# Altium PCB Palletto_V2.PcbDoc (part 2 of 2)
Units mil, origin at the board's own origin, x right, y up, seen from the top; angles counter-clockwise.
Board outline 7345 x 9595 mil, 2 copper layers (Top Layer, Bottom Layer); 77 components, 98 nets, 384 pads, 99 vias.
Unrouted connection lines stored in the file: 1.
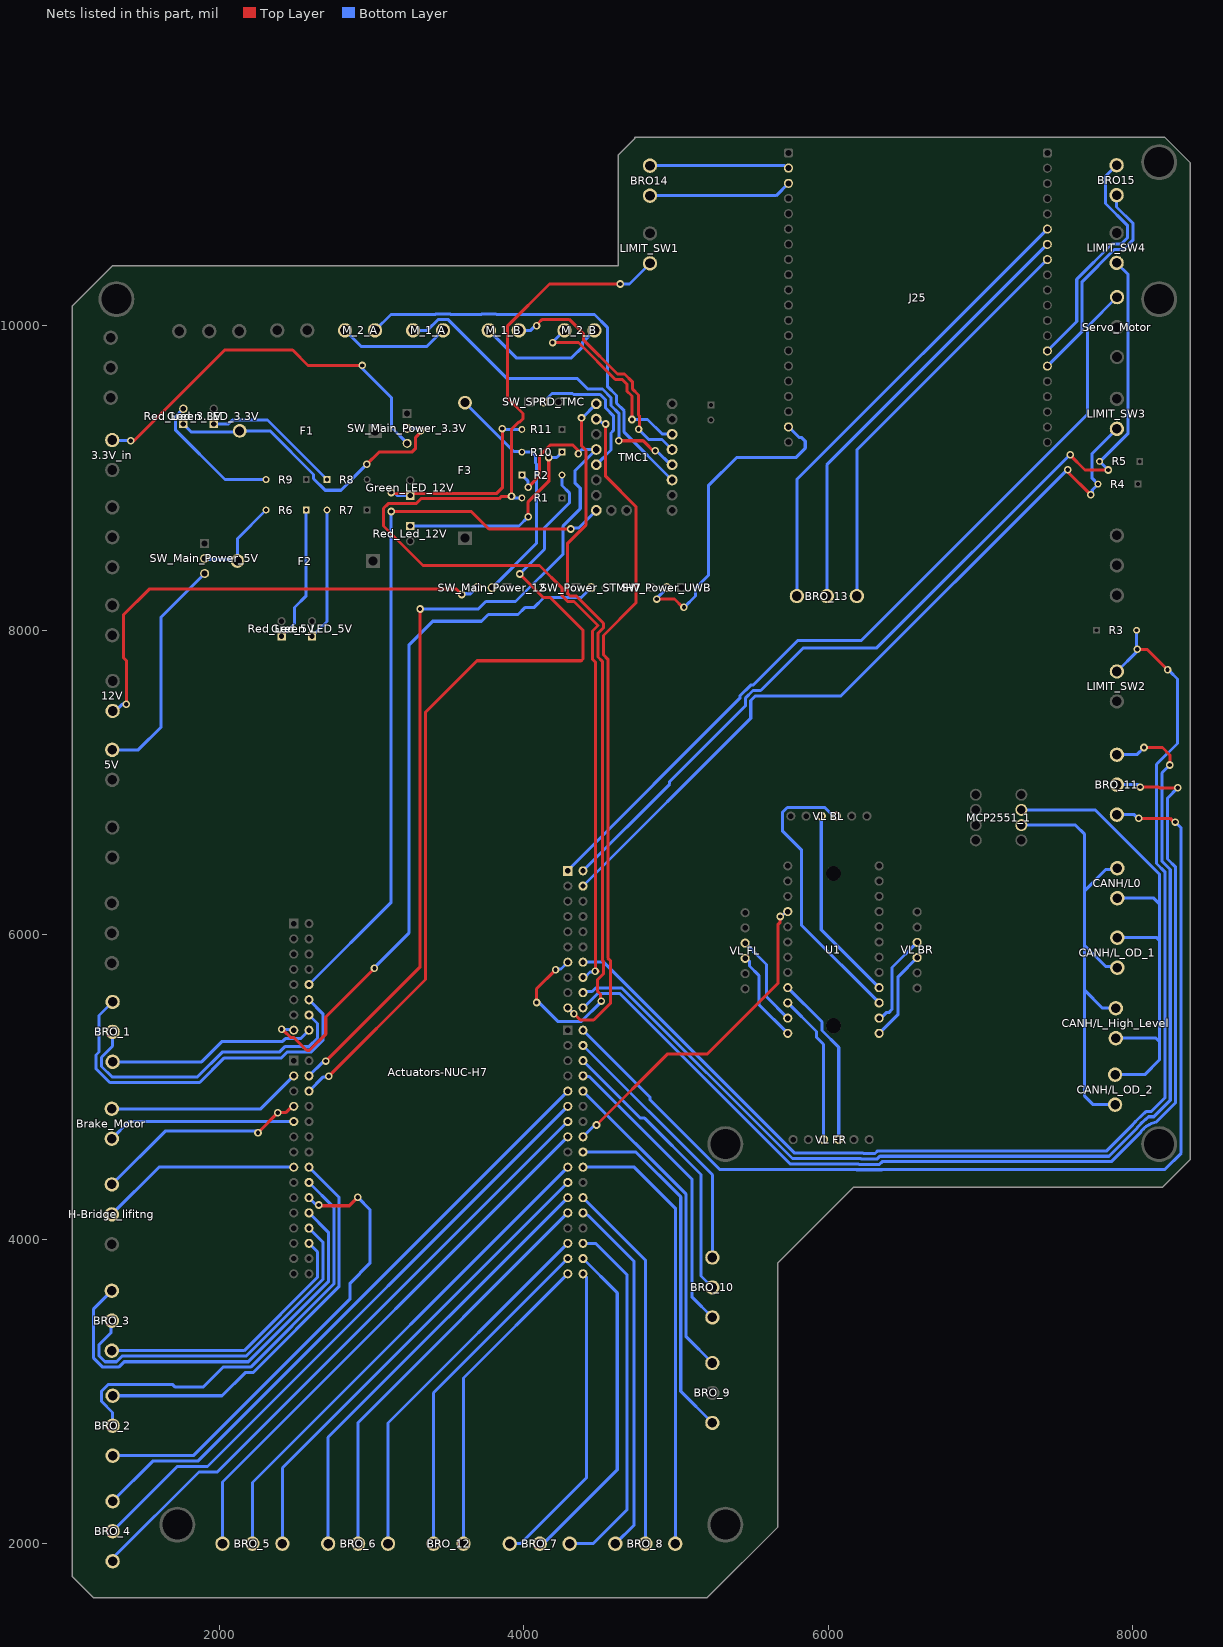
[diagram p2: the nets of this part, all layers, seen from the top]

## Via types
v1: diameter 50, hole 28, Top Layer to Bottom Layer, 99 vias

## Nets (pads, with @x,y where several pads share a name; then routed paths per layer and width w, separated by ;. In a path a pad name is that pad's centre, name@x,y a point inside that pad or via, vN(x,y) a via of type N, cw(c..) or ccw(c..) an arc to the next point about the centre after c; other vN are vias at no path point) (continued)
I2C_0_SDA: Actuators-NUC-H7.226 U1.4 | length 2218.3
  Top Layer w20: v1(4478.5,4750) 4946.4,5217.9 5207.85,5217.9 5670,5680.05 5670,6066.34 5685,6081.34 v1(5685,6120)
  Bottom Layer w20: Actuators-NUC-H7.226@4390,4673 4467,4750 v1(4478.5,4750) v1@4490,4750 ; v1(5685,6120) 5691.68,6120 5724.18,6152.5 U1.4@5735,6152.5
I2C_1_SCL: "VL FR.3" U1.10 | length 994.8
  Bottom Layer w20: U1.10@5735,5552.5 5923.5,5364 5923.5,5326.69 5970,5280.19 5970,4655
I2C_1_SDA: "VL FR.4" U1.9 | length 1136.3
  Bottom Layer w20: U1.9@5735,5652.5 5959.25,5428.25 5959.25,5371.12 6070,5260.38 6070,4655
I2C_2_SCL: "VL FL.3" U1.12 | length 614.8
  Bottom Layer w20: 5455,5845 5465.82,5845 5483.79,5827.03 5483.79,5795.05 5545,5733.84 5545,5542.5 U1.12@5735,5352.5
I2C_2_SDA: "VL FL.4" U1.11 | length 608.5
  Bottom Layer w20: 5455,5945 5595,5805 5595,5592.5 U1.11@5735,5452.5
I2C_3_SCL: "VL BR.3" U1.14 | length 617.2
  Bottom Layer w20: U1.14@6335,5452.5 6345.82,5452.5 6381.76,5488.44 6398.44,5488.44 6420,5510 6420,5785 6585,5950
I2C_3_SDA: "VL BR.4" U1.13 | length 601.1
  Bottom Layer w20: U1.13@6335,5352.5 6460,5477.5 6460,5725 6585,5850
I2C_4_SCL: "VL BL.3" U1.16 | length 1284.9
  Bottom Layer w20: 5955,6780 5955,6032.5 U1.16@6335,5652.5
I2C_4_SDA: "VL BL.4" U1.15 | length 1906.3
  Bottom Layer w20: 6055,6780 6047.35,6787.65 6026.19,6787.65 5978.09,6835.75 5731.91,6835.75 5699.25,6803.09 5699.25,6682.85 5826.5,6555.61 5826.5,6061 U1.15@6335,5552.5
Lifting_DIR_Pin: Actuators-NUC-H7.167 H-Bridge_lifitng.1 | length 1411.6
  Top Layer w20: v1(2255,4700) v1(2385,4830) 2388.22,4833.22 2440,4833.22 2479.78,4873 Actuators-NUC-H7.167@2490,4873
  Bottom Layer w20: H-Bridge_lifitng.1@1295,4360 1645,4710 v1@2255,4710
Lifting_PWM_Pin: Actuators-NUC-H7.175 H-Bridge_lifitng.2 | length 1323.3
  Bottom Layer w20: H-Bridge_lifitng.2@1295,4163.15 1604.85,4473 Actuators-NUC-H7.175@2490,4473
LM1_PIN: Actuators-NUC-H7.206 LIMIT_SW1.1 R1.2 | length 7450.6
  Top Layer w20: v1@4490,5760 4473.5,5776.5 4473.5,7788.97 4452.76,7809.72 4452.76,7995.28 4488.74,8031.26 4331.02,8188.98 4289.72,8188.98 4253.7,8225 4253.7,8275.56 4104.25,8425 3339.61,8425 3079.25,8685.36 3079.25,8801.02 3109.92,8831.69 3293.22,8831.69 3325.78,8864.25 3839.06,8864.25 3854.81,8880 v1(3920,8880) 3920,9320.32 3968.07,9368.39 3974.81,9368.39 3995.75,9389.33 3995.75,9424.5 3895.44,9524.81 3895.44,10000.23 4170.2,10275 v1(4635,10275)
  Bottom Layer w20: v1(3920,8880) 3930,8870 R1.2@3988.11,8870 ; Actuators-NUC-H7.206@4390,5720 4400.78,5720 4435.65,5754.87 4463.65,5754.87 v1(4469.39,5760.61) ; v1@4655,10275 4695,10275 LIMIT_SW1.1@4830,10410
LM2_PIN: Actuators-NUC-H7.204 LIMIT_SW2.1 R3.2 | length 7975.9
  Top Layer w20: v1(8030,7875) 8095,7875 v1(8230,7740)
  Bottom Layer w20: Actuators-NUC-H7.204@4390,5820 4526.16,5820 5780.41,4565.75 6229.86,4565.75 6232.1,4563.5 6307.9,4563.5 6325.14,4580.75 7830.75,4580.75 7998.76,4748.76 cw(c8175,4625) 8028.48,4782.83 8090.35,4840.35 8124.8,4840.35 8211.61,4927.17 8211.61,6413.94 8157.76,6467.8 8157.76,7119.52 8295,7256.77 8295,7680 v1@8245,7730 ; LIMIT_SW2.1@7897.12,7729.46 8026.89,7859.23 R3.2@8026.89,8000
LM3_PIN: Actuators-NUC-H7.194 LIMIT_SW3.1 R4.2 | length 5130.5
  Top Layer w20: v1(7575,9055) 7575,9040 v1(7725,8890)
  Bottom Layer w20: Actuators-NUC-H7.194@4390,6320 5491.75,7421.75 5491.75,7538.52 5521.48,7568.25 6083.25,7568.25 v1@7570,9055 ; v1@7735,8900 7735,8921.89 R4.2@7773.11,8960 7734.72,8998.39 7734.72,9160.75 LIMIT_SW3.1@7897.12,9323.15
LM4_PIN: Actuators-NUC-H7.192 LIMIT_SW4.1 R5.2 | length 6170.7
  Top Layer w20: v1@7590,9155 7590,9150 7686.89,9053.11 v1(7840,9053.11)
  Bottom Layer w20: Actuators-NUC-H7.192@4390,6420 4959.55,6989.55 4959.55,7006.32 5456,7502.77 5456,7553.33 5506.67,7604 5557.23,7604 5838.23,7885 6320,7885 v1@7590,9155 ; v1@7840,9045 v1(7840,9053.11) R5.2@7783.11,9110 7787.2,9110 7970.83,9293.64 7970.83,10337.32 LIMIT_SW4.1@7895,10413.15
  other v1: 7590,9152.5
MOTOR_CCW_Pin: Actuators-NUC-H7.169 Brake_Motor.2 | length 1241.8
  Bottom Layer w20: Brake_Motor.2@1295,4660 1408,4773 Actuators-NUC-H7.169@2490,4773
MOTOR_CW_Pin: Actuators-NUC-H7.163 Brake_Motor.1 | length 1284.5
  Bottom Layer w20: Brake_Motor.1@1295,4856.85 2273.85,4856.85 Actuators-NUC-H7.163@2490,5073
Net3.3V_in_1: 3.3V_in.1 SW_Main_Power_3.3V.3 | length 2561.1
  Top Layer w20: v1(1420,9245) 1440,9245 2035.75,9840.75 2482.56,9840.75 2583.3,9740 v1(2940,9740)
  Bottom Layer w20: 3.3V_in.1@1297.5,9249.73 1299.87,9247.37 1417.63,9247.37 v1(1420,9245) ; v1@2930,9730 3131.65,9528.35 3131.65,9331.49 SW_Main_Power_3.3V.3@3235,9228.15
Net5V_1: 5V.1 SW_Main_Power_5V.3 | length 1510.5
  Bottom Layer w20: 5V.1@1297.5,7214.73 1468.98,7214.73 1619.25,7365 1619.25,8087.4 SW_Main_Power_5V.3@1905,8373.15
Net12V_1: 12V.1 SW_Main_Power_12.3 | length 3114.8
  Top Layer w20: v1(1390,7515) 1390,7802.05 1370.49,7821.56 1370.49,8100.49 1540,8270 3559.57,8270 v1(3594.25,8235.31)
  Bottom Layer w20: 12V.1@1300,7470 1319.24,7470 1364.24,7515 v1@1375,7515 ; v1(3594.25,8235.31) 3598.83,8239.89 3649.23,8239.89 3689.34,8280 SW_Main_Power_12.3@3695,8280
NetActuators-NUC-H7_159: Actuators-NUC-H7.159 SW_Power_STMH7.2 | length 4608.3
  Top Layer w20: v1@2425,5370 2470,5325 2490,5325 2575.72,5239.28 2592.28,5239.28 2700,5347 2700,5460 v1(3020,5780)
  Bottom Layer w20: v1(2410,5380) 2413.5,5376.5 2486.5,5376.5 Actuators-NUC-H7.159@2490,5373 ; v1@3005,5770 3248.42,6013.42 3248.42,7905.39 3402.28,8059.25 3722.99,8059.25 3767.99,8104.25 3963.24,8104.25 4007.8,8148.82 4066.48,8148.82 4133.41,8215.75 4378.9,8215.75 SW_Power_STMH7.2@4443.15,8280
NetActuators-NUC-H7_166: Actuators-NUC-H7.166 R2.2 | length 5566.7
  Top Layer w20: v1(2720,5070) 3355.75,5705.75 3355.75,7462.16 3693.59,7800 4378.28,7800 4390,7811.72 4390,8001.2 4175.46,8215.75 4129.25,8215.75 v1(3975,8370)
  Bottom Layer w20: Actuators-NUC-H7.166@2590,4973 2681.26,5064.26 2714.26,5064.26 v1(2720,5070) ; v1(3975,8370) 4137.64,8532.64 4137.64,8674.06 4300.28,8836.7 4300.28,8903.3 4251.89,8951.69 R2.2@4251.89,9020
NetCANH/L0_1: CANH/L0.1 CANH/L_High_Level.1 CANH/L_OD_1.1 CANH/L_OD_2.1 MCP2551_1.7 | length 3501.7
  Bottom Layer w20: MCP2551_1.7@7270,6820 7755,6820 8175.87,6399.13 8175.87,6204.13 ; CANH/L_OD_2.1@7885,5080.93 8080,5080.93 8175.87,5176.8 8175.87,5299.13 ; CANH/L_High_Level.1@7890,5320.65 8154.35,5320.65 8175.87,5299.13 ; CANH/L_OD_1.1@7900,5980.93 8159.07,5980.93 8175.87,5964.13 ; CANH/L0.1@7900,6240.65 8139.35,6240.65 8175.87,6204.13 ; 8175.87,5299.13 8175.87,5964.13 ; 8175.87,5964.13 8175.87,6204.13
NetCANH/L0_2: CANH/L0.2 CANH/L_High_Level.2 CANH/L_OD_1.2 CANH/L_OD_2.2 MCP2551_1.6 | length 3188.2
  Bottom Layer w20: MCP2551_1.6@7270,6720 7625,6720 7685,6660 7685,6290 ; CANH/L_OD_2.2@7885,4884.08 7740.92,4884.08 7685,4940 7685,5635 ; CANH/L_High_Level.2@7890,5517.5 7802.5,5517.5 7685,5635 ; CANH/L_OD_1.2@7900,5784.08 7891.84,5792.24 7822.76,5792.24 7685,5930 ; CANH/L0.2@7900,6437.5 7890.26,6427.76 7822.76,6427.76 7685,6290 ; 7685,5635 7685,5930 ; 7685,5930 7685,6290
NetF1_2: F1.2 Red_Led_3.3V.1 SW_Main_Power_3.3V.2 | length 2068.4
  Top Layer w20: v1(2970,9090) 3050,9170 3265.33,9170 3290.98,9195.65 3290.98,9267.86 3325,9301.88 v1(3325,9310)
  Bottom Layer w20: Red_Led_3.3V.1@1765,9355 1818.31,9301.69 2126.81,9301.69 F1.2@2135.12,9310 2333.58,9310 2620.28,9023.3 2620.28,8996.15 2696.42,8920 2800,8920 v1(2970,9090) ; SW_Main_Power_3.3V.2@3235,9326.57 3300.31,9326.57 3316.88,9310 v1(3325,9310)
NetF2_2: F2.2 R6.2 SW_Main_Power_5V.2 | length 634.9
  Bottom Layer w20: SW_Main_Power_5V.2@1905,8471.57 1912.47,8464.1 2111.02,8464.1 F2.2@2120.12,8455 2120.12,8602.01 R6.2@2308.11,8790
NetF3_2: F3.2 R10.2 SW_Main_Power_12.2 | length 1596.8
  Bottom Layer w20: F3.2@3615,9494.88 3935.47,9174.41 3983.7,9174.41 R10.2@3988.11,9170 4053.28,9170 4078.5,9144.78 4078.5,9099.17 4085,9092.68 4085,8571.57 SW_Main_Power_12.2@3793.43,8280
NetGreen_LED_3.3V_1: Green_LED_3.3V.1 R8.1 | length 915.9
  Bottom Layer w20: Green_LED_3.3V.1@1965,9355 2060.54,9355 2086.56,9381.02 2317.09,9381.02 R8.1@2708.11,8990
NetGreen_LED_5V_1: Green_LED_5V.1 R7.2 | length 870.6
  Bottom Layer w20: Green_LED_5V.1@2610,7960 2708.11,8058.11 R7.2@2708.11,8790
NetGreen_LED_12V_1: Green_LED_12V.1 R11.2 | length 1400.2
  Top Layer w20: v1(3130,8905) 3135.74,8899.26 3254.26,8899.26 3255,8900 3824.25,8900 3860,8935.75 v1(3860,9325)
  Bottom Layer w20: v1(3130,8905) 3135.74,8899.26 3153.86,8899.26 3168.12,8885 Green_LED_12V.1@3255,8885 ; v1(3860,9325) 3865,9320 R11.2@3988.11,9320
NetJ25_19: J25.19 SW_Power_UWB.2 | length 2102.4
  Top Layer w20: v1(4875,8205) 4990.78,8205 5044.85,8150.93 v1(5052.97,8150.93)
  Bottom Layer w20: v1(4875,8205) 4875,8210 4940,8275 SW_Power_UWB.2@4940,8280 ; v1(5052.97,8150.93) 5055.37,8150.93 5129.45,8225 5129.45,8275.56 5213.37,8359.47 5213.37,8949.78 5397.84,9134.25 5787.59,9134.25 5850,9196.67 5850,9241.77 5824.54,9267.23 5808.52,9267.23 J25.19@5739.69,9336.06
NetM_1_A_1: M_1_A.1 TMC1.5 | length 2269.4
  Top Layer w20: v1(4625,9245) 4785,9245 v1@4865,9165
  Bottom Layer w20: M_1_A.1@3273.7,9970 3367.32,9970 3440.32,10042.99 3502.01,10042.99 3890,9655 4350,9655 4420.61,9584.39 4437.17,9584.39 4437.21,9584.43 4517.51,9584.43 4574.29,9527.66 4574.29,9477.1 4625,9426.39 v1(4625,9245) ; v1(4865,9180) 4873.12,9180 4965.61,9087.5 TMC1.5@4975,9087.5
NetM_1_A_2: M_1_A.2 M_2_A.1 | length 730.7
  Bottom Layer w20: M_2_A.1@2826.85,9970 2931.85,9865 3365.55,9865 M_1_A.2@3470.55,9970
NetM_1_B_1: M_1_B.1 TMC1.4 | length 1564.1
  Top Layer w20: v1@4095,10015 4122.99,10042.99 4298.66,10042.99 4392.29,9949.37 4392.29,9908.27 4616.92,9683.63 4662.96,9683.63 4713.63,9632.96 4713.63,9586.92 4755,9545.56 4755,9413.26 4762.24,9406.02 4762.24,9363.98 4760.74,9362.48 4760.74,9325.74 v1(4755,9320)
  Bottom Layer w20: M_1_B.1@3968.43,9970 4046.88,9970 4076.88,10000 v1(4085,10000) ; v1(4755,9320) 4821.52,9253.48 4909.02,9253.48 TMC1.4@4975,9187.5
NetM_1_B_2: M_1_B.2 M_2_B.1 | length 860.2
  Bottom Layer w20: M_1_B.2@3771.58,9970 3951.58,9790 4315,9790 4388.01,9863.01 4388.01,9892.73 M_2_B.1@4465.28,9970
NetM_2_A_2: M_2_A.2 TMC1.6 | length 2789.7
  Bottom Layer w20: M_2_A.2@3023.7,9970 3128.7,10075 3421.77,10075 3425.51,10078.74 3516.82,10078.74 3520.56,10075 3722.8,10075 3726.54,10078.74 3816.62,10078.74 3820.36,10075 4465,10075 4550,9990 4550,9602.5 4610.04,9542.46 4610.04,9491.91 4660.75,9441.2 4660.75,9301.76 TMC1.6@4975,8987.5
NetM_2_B_2: M_2_B.2 TMC1.3 | length 1275.1
  Top Layer w20: v1(4190,9890) 4360,9890 4602.12,9647.88 4648.16,9647.88 4677.88,9618.16 4677.88,9572.12 4711.5,9538.5 v1(4711.5,9385)
  Bottom Layer w20: v1@4180,9885 4183.43,9885 M_2_B.2@4268.43,9970 ; v1(4711.5,9385) 4813.8,9385 4909.57,9289.23 4973.27,9289.23 TMC1.3@4975,9287.5
NetR6_1: R6.1 Red_Led_5V.1 | length 897.1
  Bottom Layer w20: Red_Led_5V.1@2410,7960 2494.25,8044.25 2494.25,8149.25 2571.89,8226.89 R6.1@2571.89,8790
NetR9_2: R9.2 Red_Led_3.3V.2 | length 892.1
  Bottom Layer w20: Red_Led_3.3V.2@1765,9455 1711.69,9401.69 1711.69,9316.78 2038.47,8990 R9.2@2308.11,8990
NetR10_1: R10.1 Red_Led_12V.1 | length 1347.2
  Top Layer w20: v1(4030,8745) 4030,8843.46 4165,8978.46 v1(4165,9135)
  Bottom Layer w20: Red_Led_12V.1@3255,8685 3970,8685 v1(4030,8745) ; v1(4165,9135) 4216.89,9135 R10.1@4251.89,9170
NetSW_SPRD_TMC_2: SW_SPRD_TMC.2 TMC1.13 | length 940.2
  Bottom Layer w20: SW_SPRD_TMC.2@4131.57,9500 4186.85,9555.28 4321.39,9555.28 4328.01,9548.65 4451.98,9548.65 4452.02,9548.69 4502.71,9548.69 4538.55,9512.85 4538.55,9460.71 4589.25,9410 4589.25,9311.44 4574.25,9296.44 4574.25,9184.39 TMC1.13@4477.36,9087.51
PA0: Actuators-NUC-H7.239 BRO_6.3 | length 2462.1
  Bottom Layer w20: BRO_6.3@3109.22,2000 3109.22,2792.22 Actuators-NUC-H7.239@4290,3973
PA2: Actuators-NUC-H7.221 BRO_4.2 | length 4146.1
  Bottom Layer w20: BRO_4.2@1300,2081.84 1724.82,2506.66 1923.66,2506.66 Actuators-NUC-H7.221@4290,4873
PA8: Actuators-NUC-H7.214 BRO_10.1 | length 1745.1
  Bottom Layer w20: Actuators-NUC-H7.214@4390,5273 5240,4423 BRO_10.1@5240,3880
PB0: Actuators-NUC-H7.241 BRO_12.1 | length 2238.3
  Bottom Layer w20: BRO_12.1@3408.15,2000 3408.15,2991.15 Actuators-NUC-H7.241@4290,3873
PB2: Actuators-NUC-H7.225 BRO_5.1 | length 3612.5
  Bottom Layer w20: BRO_5.1@2021.84,2000 2021.84,2404.84 Actuators-NUC-H7.225@4290,4673
PB10: Actuators-NUC-H7.242 BRO_7.2 | length 2191.4
  Bottom Layer w20: BRO_7.2@4105.66,2000 4125.82,2000 4148.27,2022.45 4152.45,2022.45 4615,2485 4615,3648 Actuators-NUC-H7.242@4390,3873
PB11: Actuators-NUC-H7.244 BRO_7.1 | length 2031.9
  Bottom Layer w20: BRO_7.1@3908.81,2000 3980,2000 4411.62,2431.62 4411.62,3751.38 Actuators-NUC-H7.244@4390,3773
PD2: Actuators-NUC-H7.156 BRO_1.1 | length 2432.5
  Bottom Layer w20: BRO_1.1@1300,5558.69 1210.75,5469.44 1210.75,5229.53 1191.26,5210.04 1191.26,5119.96 1281.97,5029.25 1871.73,5029.25 2033.74,5191.26 2409.45,5191.26 2449.41,5231.23 2530.59,5231.23 2533.15,5228.67 2603.06,5228.67 2681.42,5307.02 2681.42,5481.58 Actuators-NUC-H7.156@2590,5573
PD11: Actuators-NUC-H7.233 BRO_6.1 | length 2925.2
  Bottom Layer w20: BRO_6.1@2715.53,2000 2715.53,2698.53 Actuators-NUC-H7.233@4290,4273
PD12: Actuators-NUC-H7.231 BRO_5.3 | length 3149.4
  Bottom Layer w20: BRO_5.3@2415.53,2000 2415.53,2498.53 Actuators-NUC-H7.231@4290,4373
PD13: Actuators-NUC-H7.229 BRO_5.2 | length 3331
  Bottom Layer w20: BRO_5.2@2218.69,2000 2218.69,2401.69 Actuators-NUC-H7.229@4290,4473
PD15: Actuators-NUC-H7.208 BRO_11.3 | length 7194.9
  Top Layer w20: v1(8075,7230) 8195.94,7230 8245,7180.94 v1(8245,7115)
  Bottom Layer w20: Actuators-NUC-H7.208@4390,5620 4396.89,5626.89 4449.92,5626.89 4473.77,5650.75 4644.86,5650.75 5765.61,4530 6215.05,4530 6217.29,4527.76 6322.71,4527.76 6339.95,4545 7845.56,4545 8026.33,4725.77 cw(c8175,4625) 8053.71,4757.46 8105.16,4804.61 8139.61,4804.61 8247.36,4912.36 8247.36,6428.75 8193.5,6482.61 8193.5,7063.5 v1(8245,7115) ; BRO_11.3@7897.12,7182.61 8027.61,7182.61 v1(8075,7230)
PE0: Actuators-NUC-H7.243 BRO_12.2 | length 2056.7
  Bottom Layer w20: BRO_12.2@3605,2000 3605,3088 Actuators-NUC-H7.243@4290,3773
PE2: Actuators-NUC-H7.235 BRO_6.2 | length 2743.6
  Bottom Layer w20: BRO_6.2@2912.38,2000 2912.38,2795.38 Actuators-NUC-H7.235@4290,4173
PE3: Actuators-NUC-H7.182 BRO_3.1 | length 2796.2
  Bottom Layer w20: BRO_3.1@1295,3661.85 1175.75,3542.6 1175.75,3218.7 1235.02,3159.42 1340.04,3159.42 1375.79,3195.17 2192.01,3195.17 2717.16,3720.33 2717.16,4045.84 Actuators-NUC-H7.182@2590,4173
PE4: Actuators-NUC-H7.176 BRO_2.1 | length 2651
  Bottom Layer w20: BRO_2.1@1300,2971.85 2019.24,2971.85 2171.07,3123.67 2221.62,3123.67 2788.66,3690.71 2788.66,4274.34 Actuators-NUC-H7.176@2590,4473
PE5: Actuators-NUC-H7.178 BRO_2.2 | length 2823.3
  Bottom Layer w20: BRO_2.2@1300,2775 1300,2862.12 1227.01,2935.12 1227.01,3002.08 1269.77,3044.84 1695.16,3044.84 1711.72,3028.28 1893.7,3028.28 2024.83,3159.42 2206.81,3159.42 2752.91,3705.52 2752.91,4210.09 Actuators-NUC-H7.178@2590,4373
PE6: Actuators-NUC-H7.180 BRO_2.3 | length 3083.1
  Top Layer w20: v1@2675,4220 2855,4220 v1(2910,4275)
  Bottom Layer w20: BRO_2.3@1300,2578.16 1829.93,2578.16 2860.16,3608.39 2860.16,3711.65 2990,3841.5 2990,4195 v1(2910,4275) ; Actuators-NUC-H7.180@2590,4273 2632.26,4230.74 2649.26,4230.74 v1(2655,4225)
PE7: Actuators-NUC-H7.230 BRO_8.1 | length 2921.5
  Bottom Layer w20: Actuators-NUC-H7.230@4390,4473 4727,4473 4996.19,4203.81 BRO_8.1@4996.19,2000
PE8: Actuators-NUC-H7.228 BRO_9.3 | length 2335.2
  Bottom Layer w20: Actuators-NUC-H7.228@4390,4573 4737,4573 5031.94,4278.06 5031.94,3001.22 BRO_9.3@5240,2793.16
PE10: Actuators-NUC-H7.234 BRO_8.2 | length 2442.6
  Bottom Layer w20: Actuators-NUC-H7.234@4390,4273 4799.34,3863.66 BRO_8.2@4799.34,2000
PE11: Actuators-NUC-H7.216 BRO_10.2 | length 1857.7
  Bottom Layer w20: Actuators-NUC-H7.216@4390,5173 4767.81,4795.19 4794.81,4795.19 5165,4425 5165,3758.15 BRO_10.2@5240,3683.15
PE12: Actuators-NUC-H7.236 BRO_8.3 | length 2372.7
  Bottom Layer w20: Actuators-NUC-H7.236@4390,4173 4400.78,4173 4415.01,4158.77 4420.51,4158.77 4725.75,3853.53 4725.75,2123.25 BRO_8.3@4602.5,2000
PE13: Actuators-NUC-H7.220 BRO_9.1 | length 2138.2
  Bottom Layer w20: Actuators-NUC-H7.220@4390,4973 5067.69,4295.31 5067.69,3359.16 BRO_9.1@5240,3186.85
PE14: Actuators-NUC-H7.218 BRO_10.3 | length 1960.4
  Bottom Layer w20: Actuators-NUC-H7.218@4390,5073 4393.87,5069.13 4430.87,5069.13 5105,4395 5105,3621.31 BRO_10.3@5240,3486.31
PE15: Actuators-NUC-H7.240 BRO_7.3 | length 2386.9
  Bottom Layer w20: BRO_7.3@4302.5,2000 4455,2000 4680,2225 4680,3765 4472,3973 Actuators-NUC-H7.240@4390,3973
PF7: Actuators-NUC-H7.186 BRO_3.3 | length 1796.3
  Bottom Layer w20: BRO_3.3@1295,3268.16 2163.89,3268.16 2645.67,3749.94 2645.67,3917.33 Actuators-NUC-H7.186@2590,3973
PF8: Actuators-NUC-H7.184 BRO_3.2 | length 2351.3
  Bottom Layer w20: BRO_3.2@1295,3465 1290.33,3460.33 1290.33,3387.76 1211.5,3308.92 1211.5,3233.5 1249.83,3195.17 1325.23,3195.17 1362.48,3232.41 2178.7,3232.41 2681.42,3735.13 2681.42,3981.58 Actuators-NUC-H7.184@2590,4073
PF10: Actuators-NUC-H7.219 BRO_4.1 | length 4116.8
  Bottom Layer w20: BRO_4.1@1300,2278.69 1563.72,2542.41 1859.41,2542.41 Actuators-NUC-H7.219@4290,4973 Actuators-NUC-H7.219@4290,4962.22
PG6: Actuators-NUC-H7.223 BRO_4.3 | length 4197.1
  Bottom Layer w20: BRO_4.3@1300,1885 1300,1903.45 1867.47,2470.92 1987.92,2470.92 Actuators-NUC-H7.223@4290,4773
PG8: Actuators-NUC-H7.160 BRO_1.3 | length 1376.2
  Bottom Layer w20: BRO_1.3@1300,5165 1885.08,5165 2020.08,5300 2417.08,5300 2434.41,5317.33 2534.33,5317.33 Actuators-NUC-H7.160@2590,5373
PG9: Actuators-NUC-H7.210 BRO_11.2 | length 7087.9
  Top Layer w20: v1(8050,6970) 8171.11,6970 8176.11,6965 v1(8297.22,6965)
  Bottom Layer w20: Actuators-NUC-H7.210@4390,5520 4393.58,5520 4488.58,5615 4630.05,5615 5750.8,4494.25 6200.24,4494.25 6202.49,4492.01 6337.51,4492.01 6354.76,4509.25 7860.36,4509.25 8054.15,4703.04 cw(c8175,4625) 8134.65,4763.08 8154.41,4768.86 8283.11,4897.56 8283.11,6443.56 8229.25,6497.41 8229.25,6897.03 v1(8297.22,6965) ; BRO_11.2@7897.12,6985.77 8034.23,6985.77 v1(8050,6970)
PG10: Actuators-NUC-H7.158 BRO_1.2 | length 1987.6
  Bottom Layer w20: BRO_1.2@1300,5361.84 1300,5268.23 1227.01,5195.23 1227.01,5134.77 1296.77,5065 1856.92,5065 2023.15,5231.23 2398.86,5231.23 2434.61,5266.98 2545.39,5266.98 2547.95,5264.42 2588.26,5264.42 2645.67,5321.83 2645.67,5417.33 Actuators-NUC-H7.158@2590,5473
PG12: Actuators-NUC-H7.212 BRO_11.1 | length 6966.4
  Top Layer w20: v1(8040,6765) 8246.88,6765 8271.88,6740 v1(8280,6740)
  Bottom Layer w20: Actuators-NUC-H7.212@4390,5373 4831.52,4931.48 4831.52,4915.04 5288.05,4458.5 6185.44,4458.5 6187.68,4456.26 6352.32,4456.26 6354.56,4458.5 8211.95,4458.5 8318.86,4565.41 8318.86,6701.08 8280,6739.93 v1(8280,6740) ; BRO_11.1@7897.12,6788.92 8011.08,6788.92 v1@8045,6755
Servo: Actuators-NUC-H7.191 Servo_Motor.1 | length 5515.9
  Bottom Layer w20: Actuators-NUC-H7.191@4290,6420 4290,6422.56 5420.26,7552.81 5420.26,7568.14 5491.86,7639.74 5507.19,7639.74 5799.15,7931.71 6215.43,7931.71 7704.66,9420.93 7704.66,9995.51 Servo_Motor.1@7897.84,10188.69
TMC_Dir: Actuators-NUC-H7.203 TMC1.9 | length 5103.8
  Top Layer w20: v1(4085,5555) 4085,5645 v1(4210,5770) v1@4215,5775 ; v1(4379.93,9395) 4379.93,9211.84 4410.75,9181.02 4410.75,8693.98 4289.45,8572.68 4289.45,8239.81 4304.53,8224.72 4345.83,8224.72 4524.49,8046.07 4524.49,8016.45 4488.5,7980.47 4488.5,7824.53 4517.16,7795.87 4517.16,5831.72 4525.75,5823.14 4525.75,5745.19 4485,5704.44 4485,5629.25 4503.86,5610.39 4503.86,5569.99 v1(4509.6,5564.25)
  Bottom Layer w20: v1@4105,5555 4105,5550 4223.77,5431.23 4379.96,5431.23 4509.6,5560.87 v1(4509.6,5564.25) ; v1(4210,5770) 4215.74,5775.74 4245.74,5775.74 Actuators-NUC-H7.203@4290,5820 ; v1@4375,9395 v1(4379.93,9395) 4384.86,9395 TMC1.9@4477.36,9487.51
TMC_EN: Actuators-NUC-H7.154 TMC1.16 | length 4776.4
  Top Layer w20: v1(3130,8780) 3656.18,8780 3771.18,8665 v1(4310,8665)
  Bottom Layer w20: Actuators-NUC-H7.154@2590,5673 3130,6213 v1(3130,8780) ; v1(4310,8665) 4315.74,8670.74 4360.6,8670.74 TMC1.16@4477.36,8787.51
TMC_Step: Actuators-NUC-H7.209 TMC1.10 | length 4427.9
  Top Layer w20: v1(4330.43,5481.98) 4372.41,5440 4460,5440 4570,5550 4570,5829.44 4552.91,5846.53 4552.91,7810.67 4524.25,7839.33 4524.25,7965.67 4737.36,8178.78 4737.36,8812.85 4538.55,9011.66 v1(4538.5,9355) v1(4538.5,9355)
  Bottom Layer w20: Actuators-NUC-H7.209@4290,5520 4291.2,5520 4329.23,5481.98 v1(4330.43,5481.98) ; TMC1.10@4477.36,9387.51 4491.13,9387.51 4517.89,9360.74 4532.76,9360.74 v1(4538.5,9355)
TMC_UART: Actuators-NUC-H7.164 R2.1 TMC1.12 | length 6068.6
  Top Layer w20: v1(2700,5170) 3320,5790 v1(3320,8140) ; v1(4030,8940) 4103.31,9013.31 4103.31,9145.08 4176.62,9218.39 4321.61,9218.39 4360,9180 v1(4360,9160)
  Bottom Layer w20: Actuators-NUC-H7.164@2590,5073 2687,5170 v1(2700,5170) ; v1(3320,8140) 3702.63,8140 3751.6,8188.98 3946.85,8188.98 4259.25,8501.38 4259.25,8686.02 4371.77,8798.54 4371.77,8932.92 4336.02,8968.67 4336.02,9046.17 TMC1.12@4477.36,9187.51 4382.51,9187.51 v1@4350,9155 ; R2.1@3988.11,9020 4030,8978.11 v1(4030,8940)
UWB_MISO: BRO15.1 J25.35 | length 1436.9
  Bottom Layer w20: J25.35@7440,9735 7668.91,9963.91 7668.91,10290.29 7879.88,10501.26 7940.04,10501.26 8003.74,10564.96 8003.74,10672.37 7895,10781.11 BRO15.1@7895,10858.15
UWB_MOSI: BRO15.2 J25.34 | length 1564.6
  Bottom Layer w20: J25.34@7440,9835 7633.16,10028.16 7633.16,10305.09 7865.08,10537.01 7925.23,10537.01 7967.99,10579.77 7967.99,10657.56 7822.01,10803.55 7822.01,10982.01 BRO15.2@7895,11055
UWB_PB13: BRO_13.1 J25.28 | length 2728.3
  Bottom Layer w20: BRO_13.1@6188.69,8225 6188.69,9183.69 J25.28@7440,10435
UWB_PB14: BRO_13.2 J25.27 | length 2909.8
  Bottom Layer w20: BRO_13.2@5991.84,8225 5991.84,9086.84 J25.27@7440,10535
UWB_PB15: BRO_13.3 J25.26 | length 3091.4
  Bottom Layer w20: BRO_13.3@5795,8225 5795,8990 J25.26@7440,10635
UWB_SCL: BRO14.2 J25.2 | length 916.2
  Bottom Layer w20: BRO14.2@4830,11051.85 5713.11,11051.85 5728.91,11036.06 J25.2@5739.69,11036.06
UWB_SDA: BRO14.1 J25.3 | length 943.3
  Bottom Layer w20: BRO14.1@4830,10855 5658.63,10855 J25.3@5739.69,10936.06
pads on no net: "VL BL.1" "VL BL.2" "VL BR.1" "VL BR.2" "VL FL.1" "VL FL.2" "VL FR.1" "VL FR.2" Actuators-NUC-H7.145 Actuators-NUC-H7.146 Actuators-NUC-H7.147 Actuators-NUC-H7.148 Actuators-NUC-H7.149 Actuators-NUC-H7.150 Actuators-NUC-H7.151 Actuators-NUC-H7.152 Actuators-NUC-H7.153 Actuators-NUC-H7.162 Actuators-NUC-H7.165 Actuators-NUC-H7.168 Actuators-NUC-H7.170 Actuators-NUC-H7.171 Actuators-NUC-H7.173 Actuators-NUC-H7.174 Actuators-NUC-H7.177 Actuators-NUC-H7.179 Actuators-NUC-H7.181 Actuators-NUC-H7.185 Actuators-NUC-H7.187 Actuators-NUC-H7.188 Actuators-NUC-H7.189 Actuators-NUC-H7.190 Actuators-NUC-H7.193 Actuators-NUC-H7.195 Actuators-NUC-H7.196 Actuators-NUC-H7.197 Actuators-NUC-H7.199 Actuators-NUC-H7.200 Actuators-NUC-H7.205 Actuators-NUC-H7.211 Actuators-NUC-H7.213 Actuators-NUC-H7.215 Actuators-NUC-H7.217 Actuators-NUC-H7.222 Actuators-NUC-H7.227 Actuators-NUC-H7.232 Actuators-NUC-H7.237 Actuators-NUC-H7.238 BRO_9.2 J25.1 J25.4 J25.5 J25.6 J25.9 J25.10 J25.11 J25.12 J25.13 J25.14 J25.15 J25.16 J25.17 J25.18 J25.22 J25.23 J25.24 J25.25 J25.29 J25.30 J25.31 J25.32 J25.33 J25.36 J25.37 J25.38 J25.39 J25.40 MCP2551_1.5 MCP2551_1.8 SW_Main_Power_3.3V.1 SW_Main_Power_5V.1 SW_Main_Power_12.1 SW_Power_STMH7.3 SW_Power_UWB.3 TMC1.11 TMC1.17 TMC1.18 U1. U1.5 U1.17 U1.18 U1.19 U1.20 U1.21 U1.22 U1.23 U1.24

## Polygon pours and split planes (outlines as drawn)
GND on Top Layer "GND_L01_P000" (solid, remove dead copper, pour order 0): 1035.22,10132.48 1035,10130 1300,10395 4620,10395 4620,11120 4730,11230 4730,11240 8210,11240 8380,11070 8380,4525 8195,4340 6165,4340 5670,3845 5670,2110 5205,1645 1175,1645 1035,1785
GND on Bottom Layer "GND_L02_P001" (solid, remove dead copper, pour order 1): 1035,10130 1300,10395 4620,10395 4620,11120 4730,11230 4730,11240 8210,11240 8380,11070 8380,4525 8195,4340 6165,4340 5670,3845 5670,2110 5205,1645 1175,1645 1035,1785

## Other copper
Top Layer:
  drawing of 271 lines, arcs and shapes, not listed

## Silkscreen, mask and mechanical layers (free items; w line width, h text height)
Top Solder:
  circle w118.11: c8175,11075 r59.06
  circle w118.11: c8175,11075 r59.06
  circle w118.11: c8175,4625 r59.06
  circle w118.11: c8175,4625 r59.06
  circle w118.11: c1325,10175 r59.06
  circle w118.11: c1325,10175 r59.06
  circle w118.11: c5325,4625 r59.06
  circle w118.11: c5325,4625 r59.06
  circle w118.11: c1725,2125 r59.06
  circle w118.11: c1725,2125 r59.06
  circle w118.11: c8175,10175 r59.06
  circle w118.11: c8175,10175 r59.06
  circle w118.11: c5325,2125 r59.06
  circle w118.11: c5325,2125 r59.06
Bottom Solder:
  circle w118.11: c8175,11075 r59.06
  circle w118.11: c8175,11075 r59.06
  circle w118.11: c8175,4625 r59.06
  circle w118.11: c8175,4625 r59.06
  circle w118.11: c1325,10175 r59.06
  circle w118.11: c1325,10175 r59.06
  circle w118.11: c5325,4625 r59.06
  circle w118.11: c5325,4625 r59.06
  circle w118.11: c1725,2125 r59.06
  circle w118.11: c1725,2125 r59.06
  circle w118.11: c8175,10175 r59.06
  circle w118.11: c8175,10175 r59.06
  circle w118.11: c5325,2125 r59.06
  circle w118.11: c5325,2125 r59.06

## Text inside footprints (layer, text, board x,y; h text height)
Actuators-NUC-H7: Top Overlay "CN8" at 2440,6138 h80; Top Overlay "CN7" at 4240,6485 h80; Top Overlay "CN10" at 3968,5326 h80; Top Overlay "CN9" at 2666,5126 h80; Bottom Overlay "10-" at 4466,6009.16 h19.68; Bottom Overlay "20-" at 4476.69,5509.87 h19.68 r22; Bottom Overlay "-1" at 4259,6400.31 h39.37; Bottom Overlay "-1" at 2459,6053.31 h39.37; Bottom Overlay "10-" at 2666,5663.16 h19.68; Bottom Overlay "-1" at 4259,5353.31 h39.37; Bottom Overlay "10-" at 4464,4963.16 h19.68; Bottom Overlay "20-" at 4474.69,4463.87 h19.68 r22; Bottom Overlay "30-" at 4471.34,3963.16 h19.68 r2; Bottom Overlay "-1" at 2459,5153.31 h39.37; Bottom Overlay "10-" at 2666,4763.16 h19.68; Bottom Overlay "20-" at 2677.69,4263.87 h19.68 r22; Bottom Overlay "30-" at 2674.34,3763.16 h19.68 r2
U1: Top Overlay "SD6" at 6290,6127.5 h20 r90; Top Overlay "SC6" at 6290,6227.5 h20 r90; Top Overlay "SD7" at 6290,6322.5 h20 r90; Top Overlay "SC7" at 6290,6422.5 h20 r90; Top Overlay "SD4" at 6290,5737.5 h20 r90; Top Overlay "SC4" at 6290,5837.5 h20 r90; Top Overlay "SD5" at 6290,5932.5 h20 r90; Top Overlay "SC5" at 6290,6032.5 h20 r90; Top Overlay "SD3" at 6290,5527.5 h20 r90; Top Overlay "SC2" at 6290,5432.5 h20 r90; Top Overlay "SD2" at 6290,5332.5 h20 r90; Top Overlay "SC3" at 6290,5627.5 h20 r90; Top Overlay "SC1" at 5785,5372.5 h20 r270; Top Overlay "SD1" at 5785,5472.5 h20 r270; Top Overlay "SC0" at 5785,5567.5 h20 r270; Top Overlay "SD0" at 5785,5667.5 h20 r270; Top Overlay "A2" at 5785,5767.5 h20 r270; Top Overlay "A1" at 5780,5867.5 h20 r270; Top Overlay "A0" at 5780,5972.5 h20 r270; Top Overlay "RST" at 5780,6077.5 h20 r270; Top Overlay "SCL" at 5780,6172.5 h20 r270; Top Overlay "SDA" at 5780,6277.5 h20 r270; Top Overlay "GND" at 5778.2,6377.5 h20 r270; Top Overlay "VIN" at 5778.2,6477.5 h20 r270
"VL BL": Top Overlay "XSHUT" at 5769,6876 h35 r90; Top Overlay "VIN" at 6259,6861 h35 r90; Top Overlay "GND" at 6159,6861 h35 r90; Top Overlay "SCL" at 5954,6866 h35 r90; Top Overlay "SDA" at 6069,6866 h35 r90; Top Overlay "INT" at 5869,6871 h35 r90
"VL BR": Top Overlay "XSHUT" at 6681,6136 h35; Top Overlay "VIN" at 6666,5646 h35; Top Overlay "GND" at 6666,5746 h35; Top Overlay "SCL" at 6671,5951 h35; Top Overlay "SDA" at 6671,5836 h35; Top Overlay "INT" at 6676,6036 h35
"VL FL": Top Overlay "XSHUT" at 5359,5659 h35 r180; Top Overlay "VIN" at 5374,6149 h35 r180; Top Overlay "GND" at 5374,6049 h35 r180; Top Overlay "SCL" at 5369,5844 h35 r180; Top Overlay "SDA" at 5369,5959 h35 r180; Top Overlay "INT" at 5364,5759 h35 r180
"VL FR": Top Overlay "XSHUT" at 5784,4751 h35 r90; Top Overlay "VIN" at 6274,4736 h35 r90; Top Overlay "GND" at 6174,4736 h35 r90; Top Overlay "SCL" at 5969,4741 h35 r90; Top Overlay "SDA" at 6084,4741 h35 r90; Top Overlay "INT" at 5884,4746 h35 r90